# Altium PCB 车模底盘.PcbDoc (part 1 of 2)
Units mil, origin at the board's own origin, x right, y up, seen from the top; angles counter-clockwise.
Board outline 3926.98 x 3180.12 mil, 4 copper layers (Top Layer, GND, POWER, Bottom Layer); 159 components, 168 nets, 630 pads, 255 vias.
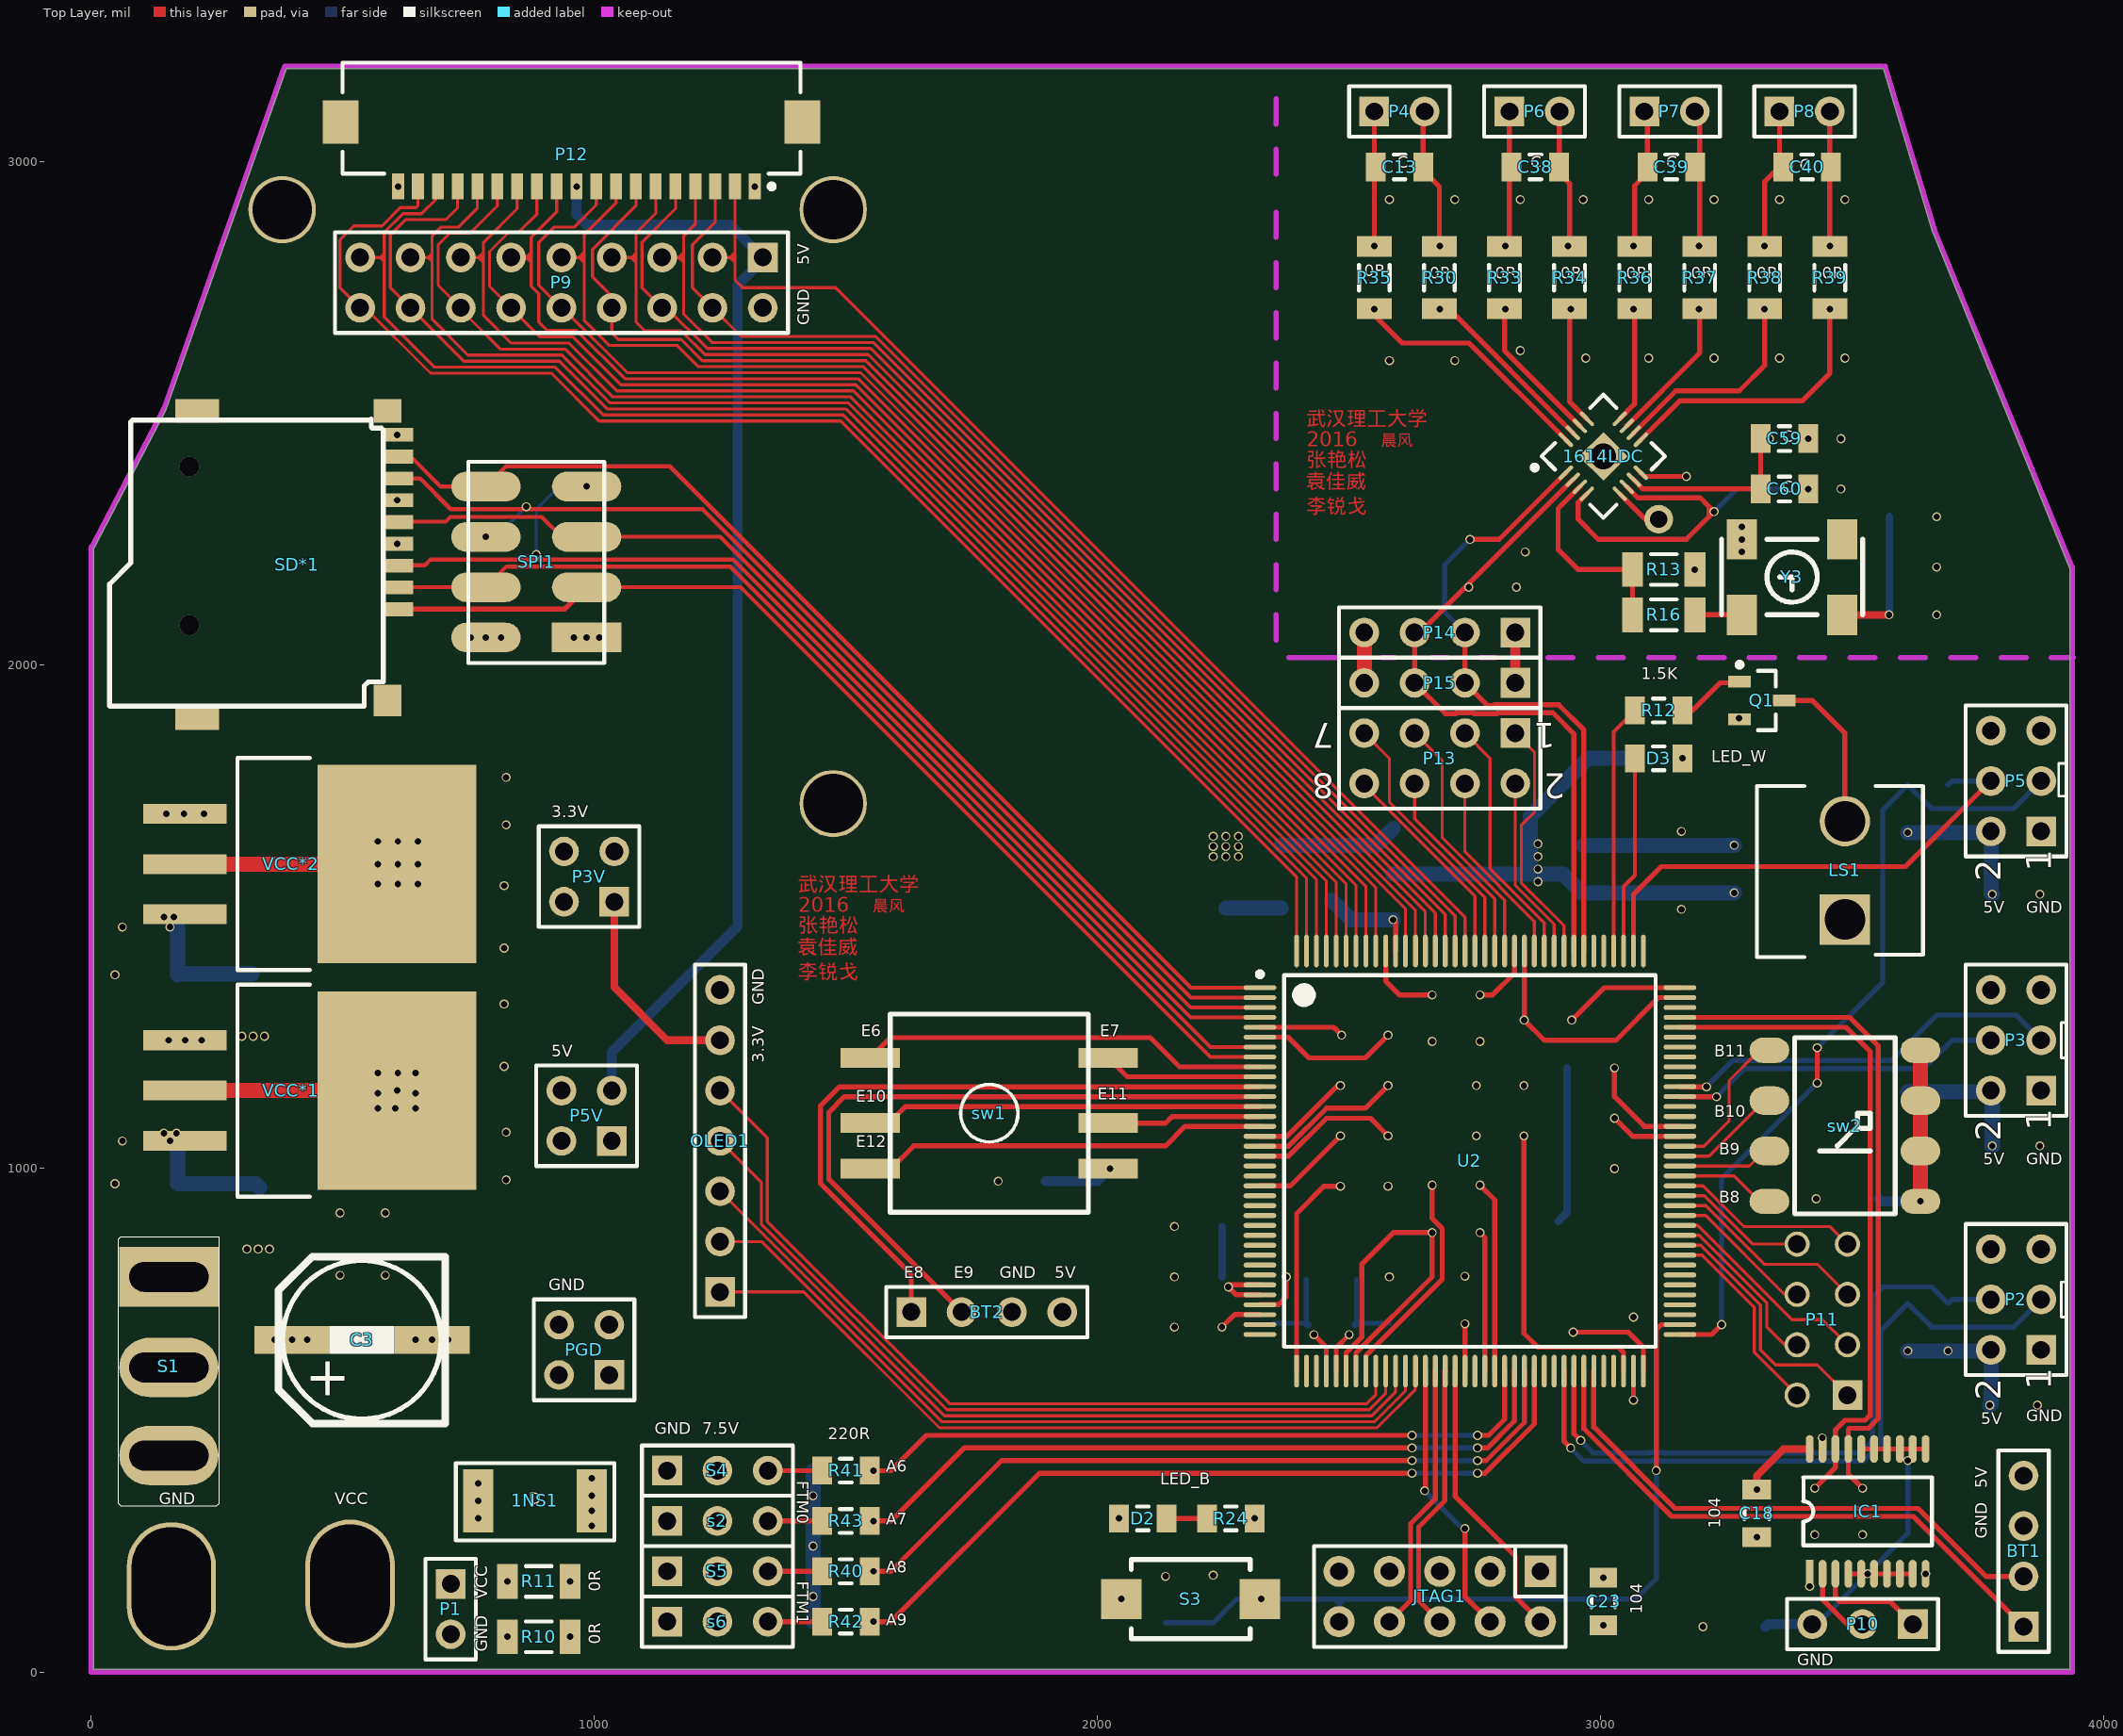
[diagram p0: Top Layer view]
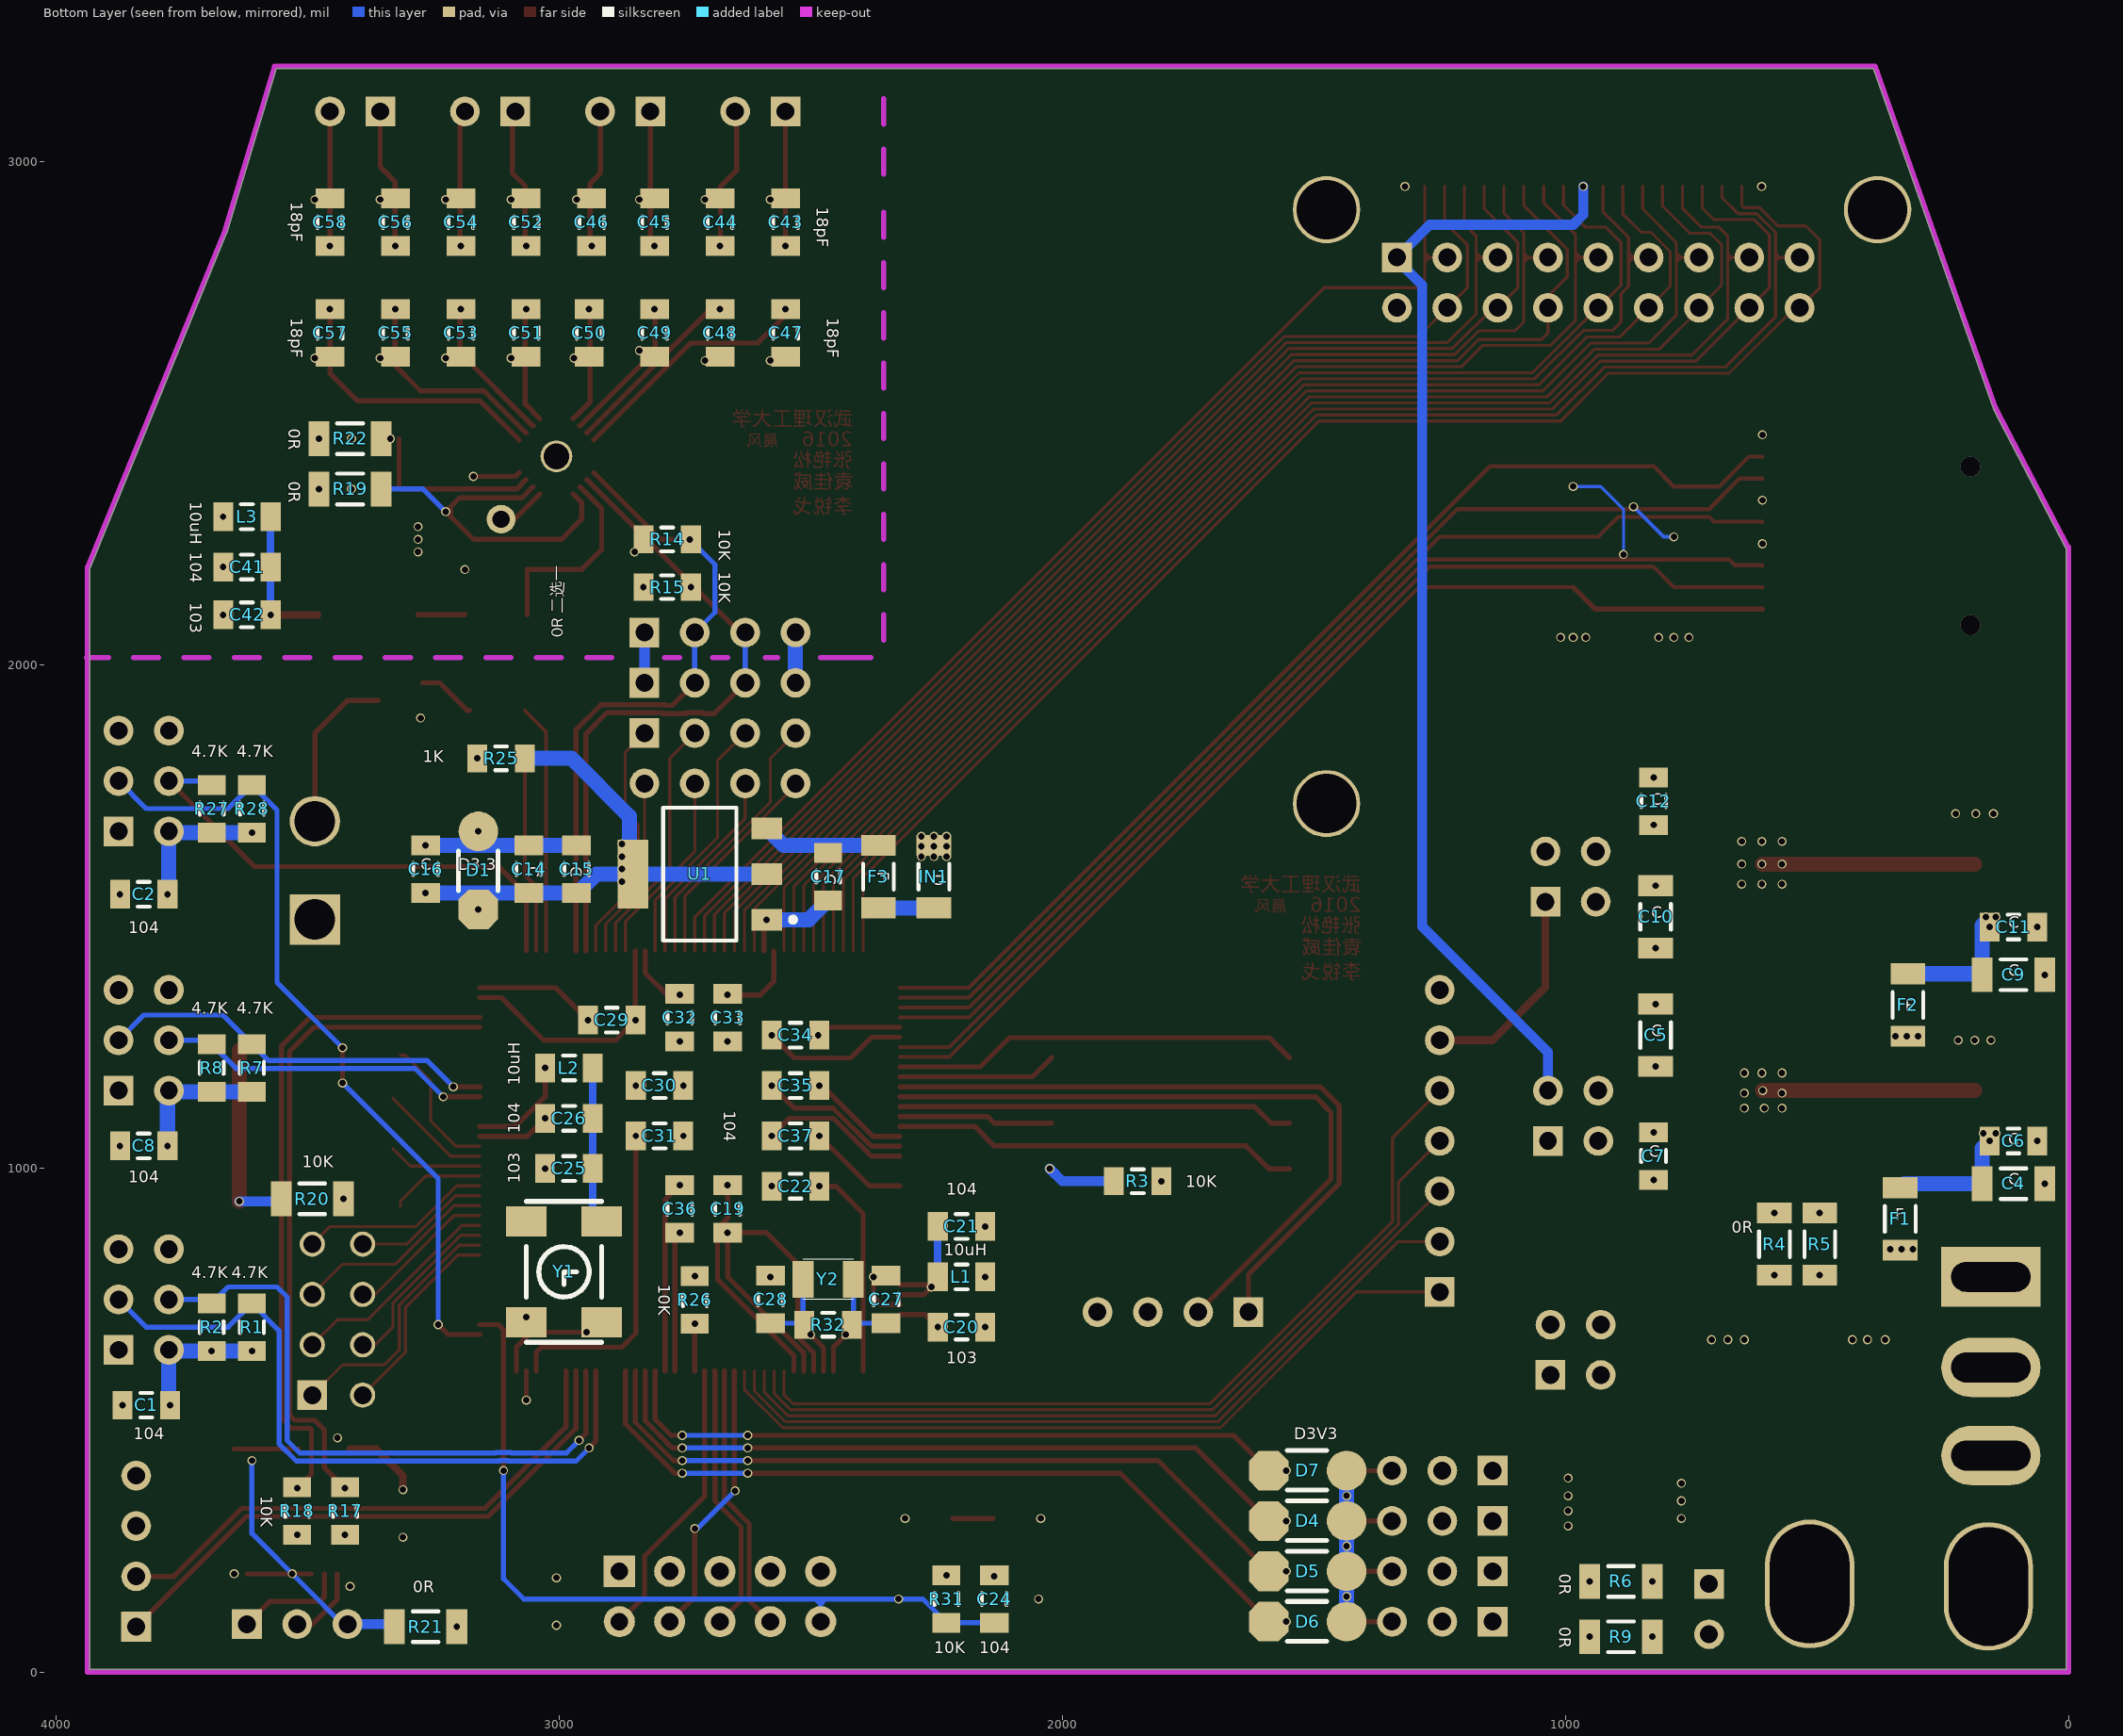
[diagram p1: Bottom Layer view, seen from below]
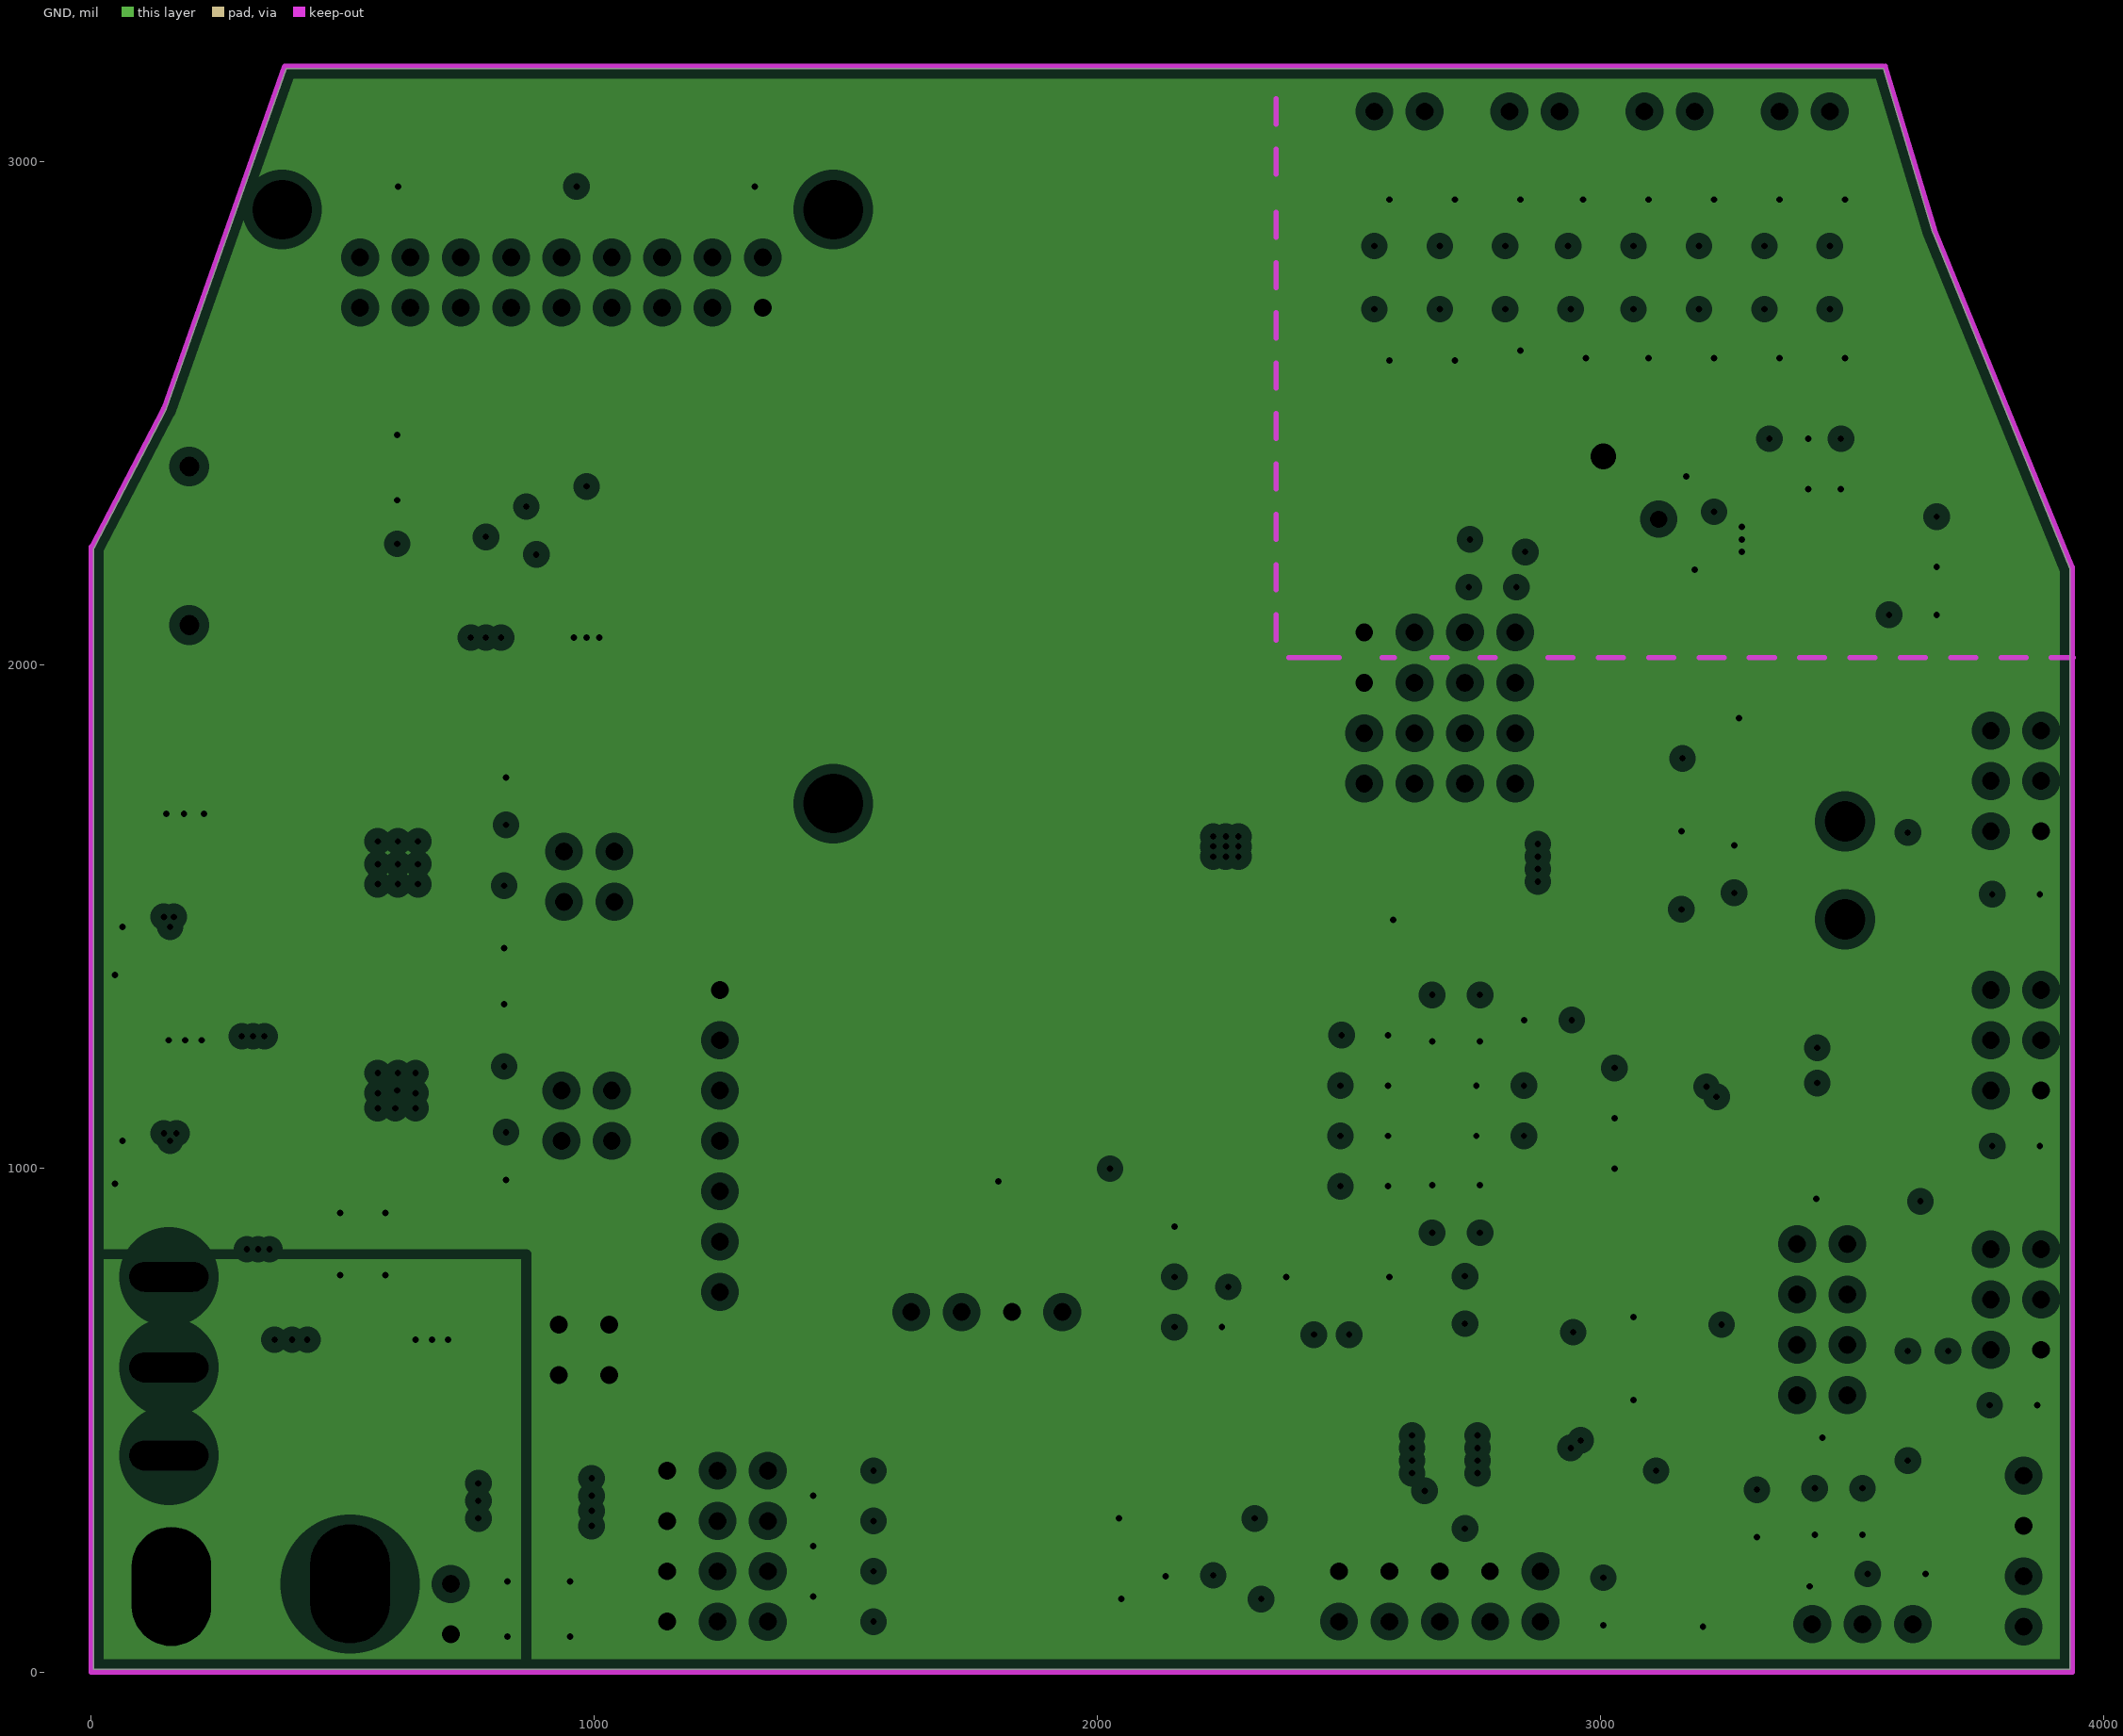
[diagram p2: GND, clearances drawn from the general rule]
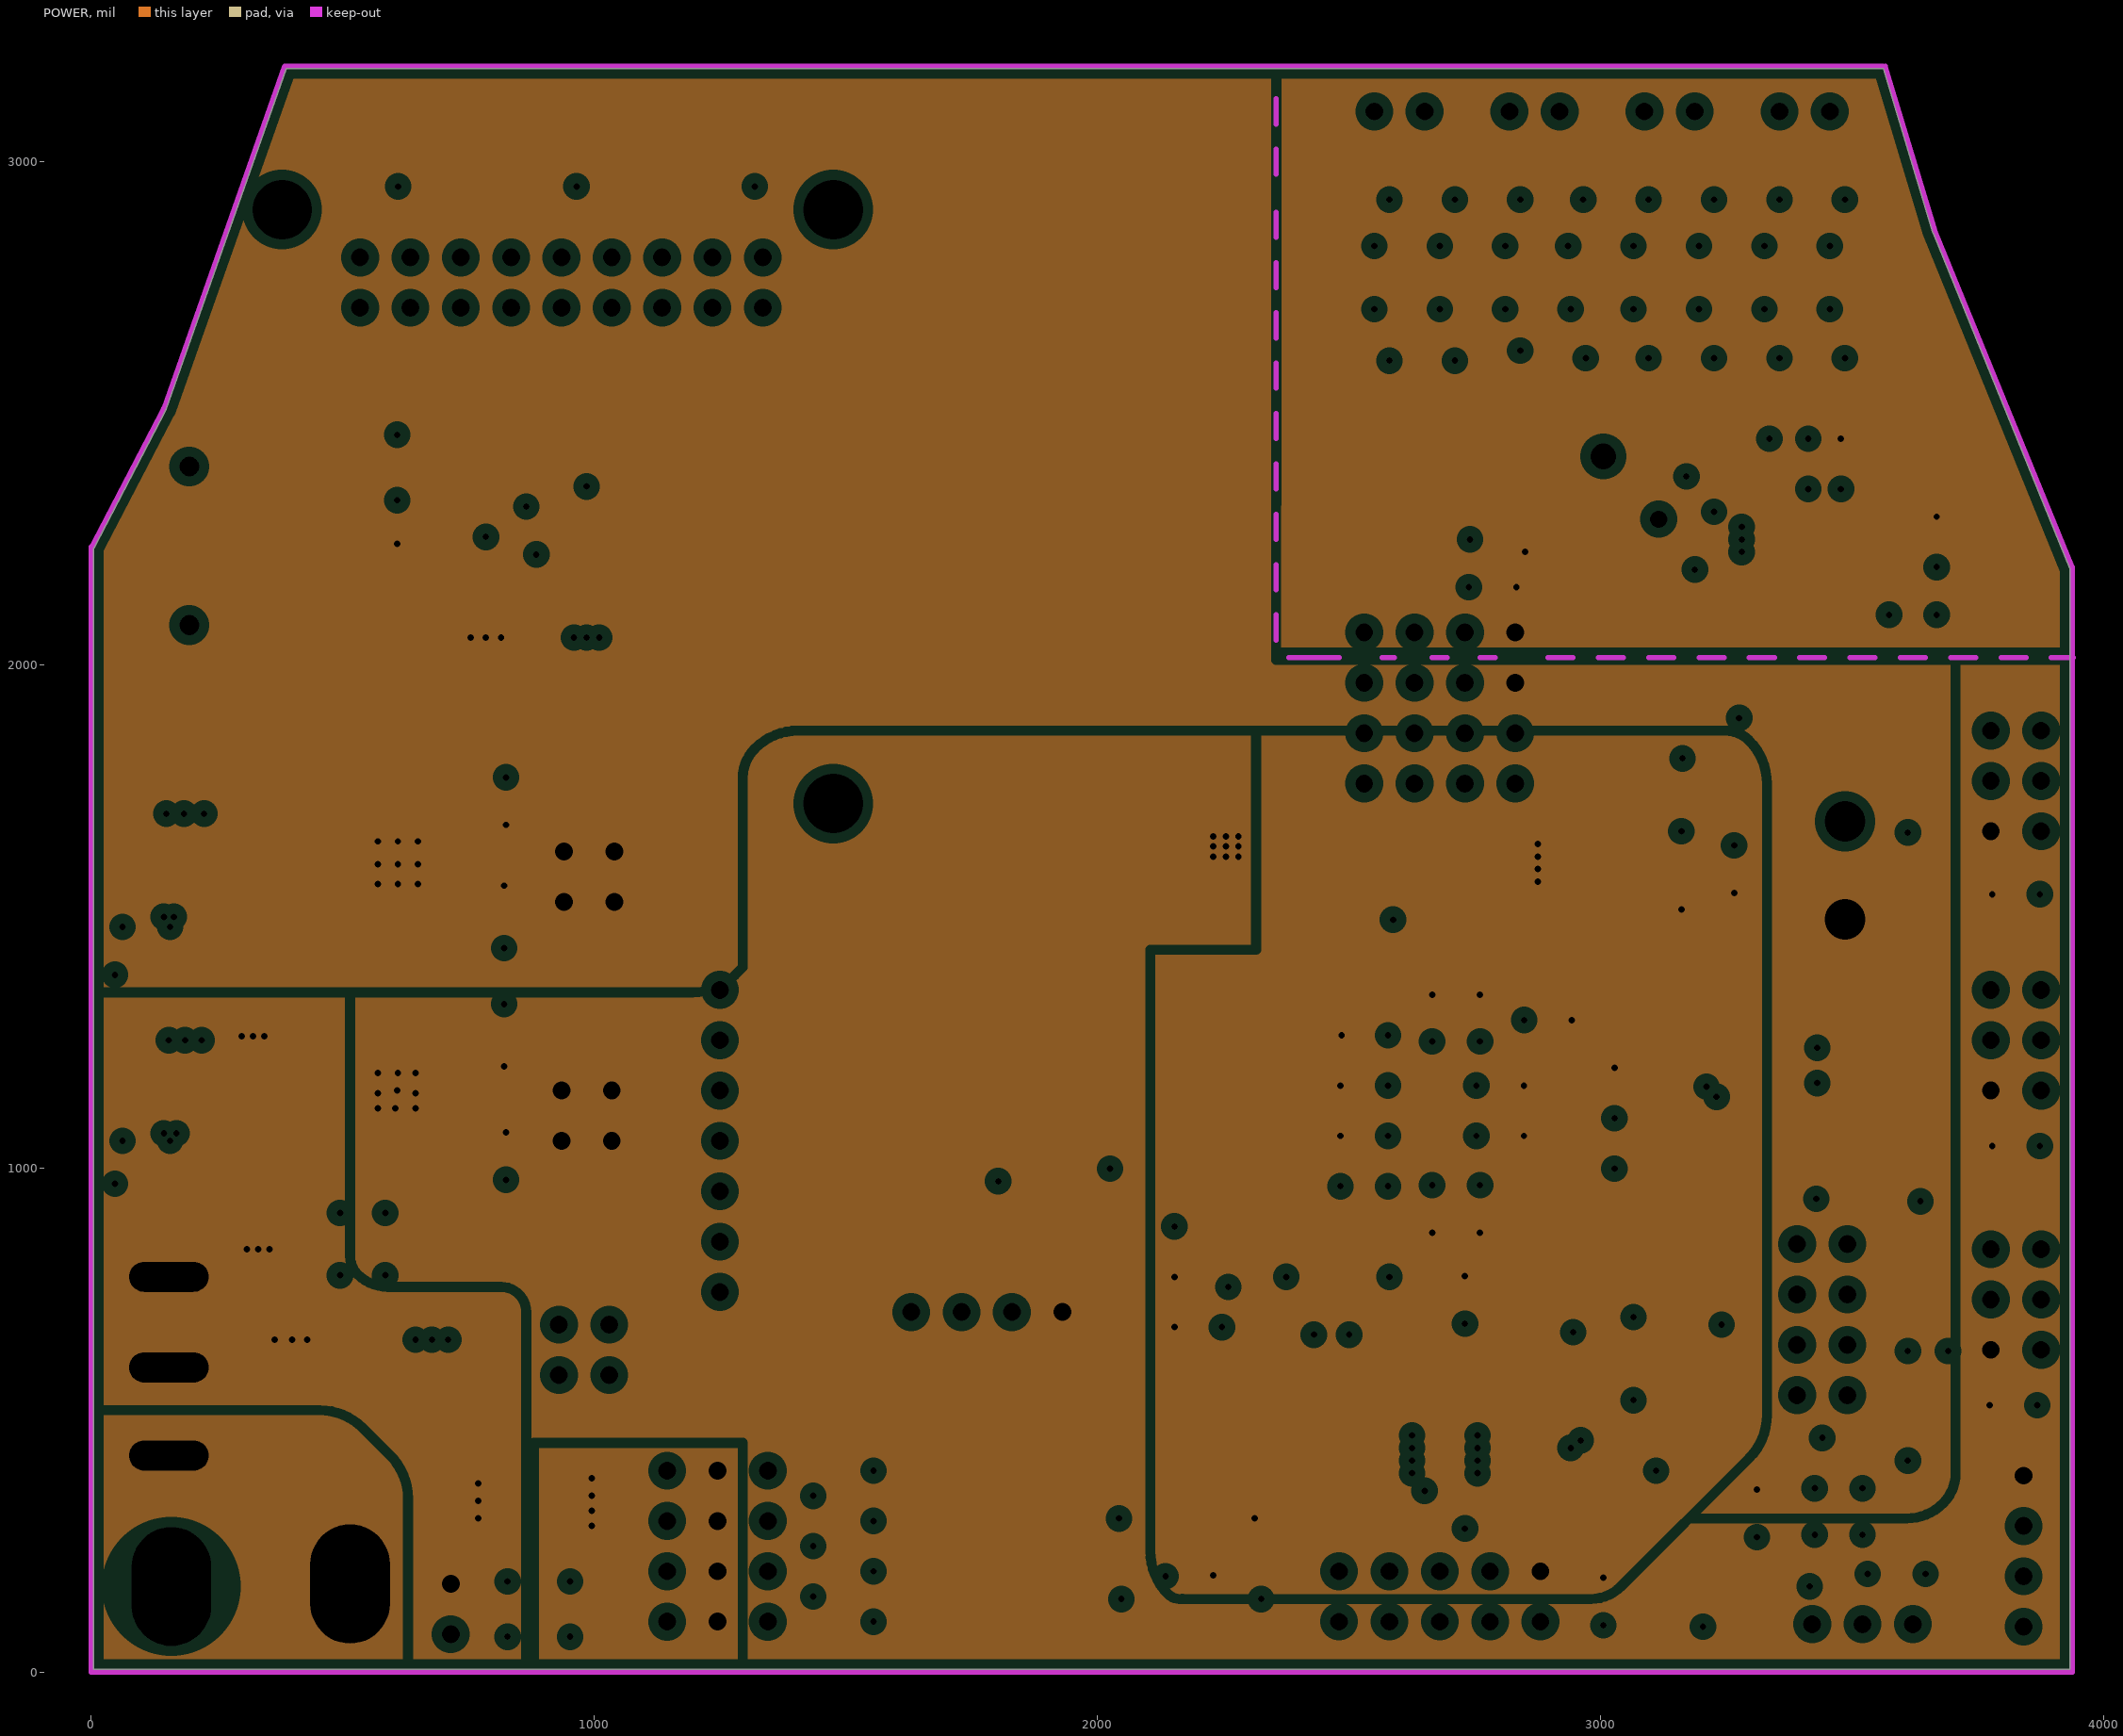
[diagram p3: POWER, clearances drawn from the general rule]

## Layer stack, top to bottom
Top Layer: signal copper 1.4
Dielectric: core 12.6, FR-4, Dk 4.8
GND: plane copper 1.4, net GND
Dielectric: prepreg 12.6, FR-4, Dk 4.8
POWER: plane copper 1.4, net (Multiple Nets)
Dielectric: core 12.6, FR-4, Dk 4.8
Bottom Layer: signal copper 1.4

## Board outline
5.02,5 5.02,2231.41 ccw(c1.5,2234.98) 5.94,2232.66 149.45,2507.66 ccw(c145,2509.98) 149.73,2508.31 388.55,3184.97 3560,3184.97 ccw(c3560,3189.98) 3561.23,3185.12 3660.2,2858.53 ccw(c3665,2859.98) 3660.36,2858.09 3931.99,2191.34 3931.99,5.02

## Design rules (kind name [scope] priority, off if disabled: settings)
Clearance [All] p1: gap=6
PlaneClearance [All] p1: clearance=20
PlaneConnect [All] p1: planeconnectstyle=Direct reliefexpansion=20 reliefentries=4 reliefconductorwidth=10 reliefairgap=10
PolygonConnect [All] p1: connectstyle=Relief reliefconductorwidth=10 reliefentries=4 polygonreliefangle="90 Angle" airgapwidth=10
RoutingVias [All] p1: holewidth=28 width=50 viastyle="Through Hole" minholewidth=28 minwidth=50 maxholewidth=28 maxwidth=50
SolderMaskExpansion [All] p1: expansion=4
Width [All] p1: maxlimit=50 minlimit=6 preferedwidth=10 minimp=50.000000 maximp=50.000000 favimp=50.000000
26 further rules are at their usual default settings.

## Components (designator, comment, footprint, x,y, rotation, side; value= is the part's Value field where it differs from the comment)
1NS1 "SK34" SK54 900,339.98 r0 top
1614LDC "LDC1614" LDC1614 3005,2414.98 r45 top
BT1 "Header 4" HDR1X4 3840,89.98 r90 top
BT2 "Header 4" HDR1X4 1630,714.98 r0 top
C1 "100nF" C2012 3820,529.98 r180 bottom
C2 "100nF" C2012 3825,1544.98 r180 bottom
C3 "Cap Pol1" SMD-EC-F8 400,660 r0 top
C4 "Cap Pol1" 1206(2) 110,969.98 r180 bottom
C5 "Cap Pol1" 1206(2) 821.06,1264.98 r90 bottom
C6 "Cap" C2012 110,1054.98 r0 bottom
C7 "Cap" C2012 825,1024.98 r90 bottom
C8 "100nF" C2012 3825,1044.98 r180 bottom
C9 "Cap Pol1" 1206(2) 110,1384.98 r180 bottom
C10 "Cap Pol1" 1206(2) 821.06,1499.98 r270 bottom
C11 "Cap" C2012 110,1479.98 r0 bottom
C12 "Cap" C2012 825,1729.98 r270 bottom
C13 "Cap" C2012 2600,2989.98 r180 top
C14 "10uF" C2012 3060,1594.98 r270 bottom
C15 "100nF" C2012 2965,1594.98 r270 bottom
C16 "2.2uF" C2012 3265,1594.98 r270 bottom
C17 "100nF" R2012 2465,1579.98 r90 bottom
C18 "100nF" C2012 3310,314.98 r270 top
C19 "100nF" c2012 2665,919.98 r270 bottom
C20 "100nF" C2012 2200,684.98 r180 bottom
C21 "10nF" C2012 2200,884.98 r0 bottom
C22 "100nF" c2012 2530,964.98 r180 bottom
C23 "100nF" R2012 3005,139.98 r270 top
C24 "100nF" C2012 2135,144.98 r270 bottom
C25 "10nF" C2012 2980,999.98 r180 bottom
C26 "100nF" C2012 2980,1099.98 r180 bottom
C27 "18pF" C2012 2350,739.98 r270 bottom
C28 "18pF" C2012 2580,739.98 r270 bottom
C29 "Cap" C2012 2895,1294.98 r0 bottom
C30 "Cap" C2012 2800,1164.98 r0 bottom
C31 "Cap" C2012 2800,1064.98 r0 bottom
C32 "Cap" C2012 2760,1299.98 r90 bottom
C33 "Cap" C2012 2665,1299.98 r90 bottom
C34 "Cap" C2012 2530,1264.98 r180 bottom
C35 "Cap" C2012 2530,1164.98 r180 bottom
C36 "Cap" C2012 2760,919.98 r270 bottom
C37 "Cap" C2012 2530,1064.98 r180 bottom
C38 "Cap" C2012 2870,2989.98 r180 top
C39 "Cap" C2012 3140,2989.98 r0 top
C40 "Cap" C2012 3410,2989.98 r180 top
C41 "10nF" C2012 3620,2194.98 r180 bottom
C42 "100nF" C2012 3620,2099.98 r180 bottom
C43 "Cap" C2012 2550,2879.98 r90 bottom
C44 "Cap" C2012 2680,2879.98 r270 bottom
C45 "Cap" C2012 2810,2879.98 r90 bottom
C46 "Cap" C2012 2935,2879.98 r270 bottom
C47 "Cap" C2012 2550,2659.98 r270 bottom
C48 "Cap" C2012 2680,2659.98 r90 bottom
C49 "Cap" C2012 2810,2659.98 r270 bottom
C50 "Cap" C2012 2940,2659.98 r90 bottom
C51 "Cap" C2012 3065,2659.98 r270 bottom
C52 "Cap" C2012 3065,2879.98 r90 bottom
C53 "Cap" C2012 3195,2659.98 r90 bottom
C54 "Cap" C2012 3195,2879.98 r270 bottom
C55 "Cap" C2012 3325,2659.98 r270 bottom
C56 "Cap" C2012 3325,2879.98 r90 bottom
C57 "Cap" C2012 3455,2659.98 r90 bottom
C58 "Cap" C2012 3455,2879.98 r270 bottom
C59 "Cap" C2012 3365,2449.98 r180 top
C60 "Cap" C2012 3365,2349.98 r180 top
D1 "1N4729A" "hole-chip diode" 3200,1669.98 r270 bottom
D2 "POWER" R2012 2090,304.98 r180 top
D3 "POWER" R2012 3115,1814.98 r180 top
D4 "1N4729A" "hole-chip diode" 1435,339.98 r0 bottom
D5 "1N4729A" "hole-chip diode" 1435,239.98 r0 bottom
D6 "1N4729A" "hole-chip diode" 1435,139.98 r0 bottom
D7 "1N4729A" "hole-chip diode" 1435,439.98 r0 bottom
F1 "1.5A" 1206(2) 335,900 r90 bottom
F2 "500mA" 1206(2) 320,1324.98 r90 bottom
F3 "300mA" 1206(2) 2365,1579.98 r270 bottom
IC1 "74LVC245" "74LVC245 TSSOP" 3415,194.98 r90 top
IN1 "1SS355" 1206(2) 2255,1579.98 r270 bottom
JTAG1 "Header 5X2" IDC5X2 2680,149.98 r180 top
L1 "Inductor" C2012 2200,784.98 r0 bottom
L2 "Inductor" C2012 2980,1199.98 r180 bottom
L3 "Inductor" C2012 3620,2294.98 r180 bottom
LS1 "Buzzer" ABSM-1574 3475,1360 r90 top
OLED1 "Header 7" HDR1X7 1250,754.98 r90 top
P1 "Header 2" HDR1X2 715,175 r270 top
P2 "Header 3X2" HDR2X3 3875,639.98 r90 top
P3 "Header 3X2" HDR2X3 3875,1154.98 r90 top
P3V "Header 2X2" HDR2X2 1040,1529.98 r90 top
P4 "Header 2" HDR1X2 2550,3099.98 r0 top
P5 "Header 3X2" HDR2X3 3875,1669.98 r90 top
P5V "Header 2X2" HDR2X2 1035,1054.98 r90 top
P6 "Header 2" HDR1X2 2818.33,3099.98 r0 top
P7 "Header 2" HDR1X2 3086.67,3099.98 r0 top
P8 "Header 2" HDR1X2 3355,3099.98 r0 top
P9 "Header 9X2" HDR2X9 1335,2809.98 r180 top
P10 "Header 3" HDR1X3 3620,94.98 r180 top
P11 "Header 4X2" HDR2X4#1 3490,549.98 r90 top
P12 "Header 19" FFC/SM1.0-2H19 955,3014.98 r180 top
P13 "Header 4X2" HDR2X4#2 2830,1864.98 r180 top
P14 "Header 4" HDR1X4 2830,2064.98 r180 top
P15 "Header 4" HDR1X4 2830,1964.98 r180 top
PGD "Header 2X2" HDR2X2 1030,589.98 r90 top
Q1 "QNPN" SOT95P240-3N 3320,1930 r0 top
R1 "Res2" R2012 3610,684.98 r270 bottom
R2 "Res2" R2012 3690,684.98 r90 bottom
R3 "10k" R2012 1850,974.98 r0 bottom
R4 "Res2" 1206(2) 585,850 r270 bottom
R5 "Res2" 1206(2) 495,850 r270 bottom
R6 "Res2" 1206(2) 890,179.98 r180 bottom
R7 "Res2" R2012 3610,1199.98 r90 bottom
R8 "Res2" R2012 3690,1199.98 r270 bottom
R9 "Res2" 1206(2) 890,69.98 r180 bottom
R10 "Res2" 1206(2) 890,69.98 r180 top
R11 "Res2" 1206(2) 890,179.98 r180 top
R12 "Res2" R2012 3115,1910 r180 top
R13 "Res2" 1206(2) 3125,2189.98 r0 top
R14 "Res2" R2012 2785,2249.98 r0 bottom
R15 "Res2" R2012 2785,2154.98 r0 bottom
R16 "Res2" 1206(2) 3125,2099.98 r0 top
R17 "Res2" R2012 3425,319.98 r270 bottom
R18 "Res2" R2012 3520,319.98 r270 bottom
R19 "Res2" 1206(2) 3415,2349.98 r0 bottom
R20 "Res2" 1206(2) 3490,939.98 r0 bottom
R21 "Res2" 1206(2) 3265,89.98 r0 bottom
R22 "Res2" 1206(2) 3415,2449.98 r0 bottom
R24 "1K" R2012 2265,304.98 r0 top
R25 "1K" R2012 3115,1815 r180 bottom
R26 "10K" R2012 2730,739 r270 bottom
R27 "Res2" R2012 3690,1714.98 r270 bottom
R28 "Res2" R2012 3610,1714.98 r90 bottom
R30 "Res2" 1206(2) 2679.29,2769.98 r270 top
R31 "10K" R2012 2230,144.98 r90 bottom
R32 "1M" R2012 2465,689.98 r0 bottom
R33 "Res2" 1206(2) 2808.57,2769.98 r270 top
R34 "Res2" 1206(2) 2937.86,2769.98 r270 top
R35 "Res2" 1206(2) 2550,2769.98 r270 top
R36 "Res2" 1206(2) 3067.14,2769.98 r90 top
R37 "Res2" 1206(2) 3196.43,2769.98 r90 top
R38 "Res2" 1206(2) 3325.71,2769.98 r90 top
R39 "Res2" 1206(2) 3455,2769.98 r90 top
R40 "220R" R2012 1500,199.98 r0 top
R41 "220R" R2012 1500,399.98 r0 top
R42 "220R" R2012 1500,99.98 r0 top
R43 "220R" R2012 1500,299.98 r0 top
S1 "SW-SPST" SW-125V6A(-) 155,785 r270 top
s2 "Header 3" HDR1X3 1145,299.98 r0 top
S3 "SW-PB" SMT_Button 2185,144.98 r0 top
S4 "Header 3" HDR1X3 1145,399.98 r0 top
S5 "Header 3" HDR1X3 1145,199.98 r0 top
s6 "Header 3" HDR1X3 1145,99.98 r0 top
SD*1 "TF_card" SD_card 265,2274.98 r0 top
SPI1 "Header 4X2A" "SMT head4*1" 880,2209.98 r180 top
sw1 "SW-5" SW-5 1785,1109.98 r0 top
sw2 "switch-4to4" switch_4to4 3335,934.98 r0 top
U1 "REG1117" SOT223 2720,1584.98 r90 bottom
U2 "K60P144" LQFP144 2740,1014.98 r0 top
VCC*1 "LM1084" "DPAK LM2940" 435,1154.98 r0 top
VCC*2 "LM1086" "DPAK LM2940" 435,1604.98 r0 top
Y1 "50MHZ" 贴片有源晶体 3065,894.98 r270 bottom
Y2 "32.768K" CT3215 2415,779.98 r0 bottom
Y3 "8MHZ" 贴片有源晶体 3480,2249.98 r180 top

## Footprints (in the part's own frame and the unit in brackets; to place one, negate y for a bottom-side part, rotate by r counter-clockwise, add the part's x,y. Pads: shape width x height; smd on the part's side, far side on the other; paste and mask are expansions set on the pad)
"74LVC245 TSSOP" [mm]
  rect 1.4x0.4 smd: 1(0,0)
  oval 1.4x0.4 smd: 2(0,-0.65) 3(0,-1.3) 4(0,-1.95) 5(0,-2.6) 6(0,-3.25) 7(0,-3.9) 8(0,-4.55) 9(0,-5.2) 10(0,-5.85) 11(6.3,-5.85) 12(6.3,-5.2) 13(6.3,-4.55) 14(6.3,-3.9) 15(6.3,-3.25) 16(6.3,-2.6) 17(6.3,-1.95) 18(6.3,-1.3) 19(6.3,-0.65) 20(6.3,0)
  silkscreen extent 1.43,-6.18 4.87,0.33
1206(2) [mm]
  rect 1.05x1.75 smd: 1(-1.575,0) 2(1.575,0)
  silkscreen extent -0.65,-0.77 0.65,0.77, body extent -1.6,-0.8 1.6,0.8, height 1.6
ABSM-1574 [mil] "Magnetic Transducer Buzzer"
  rect 100x100 hole 80: 1A(135,-10)
  round 100 hole 80: 2A(330,-10)
  silkscreen extent 60,-165 400,165
C2012 [mm] "Chip Capacitor, 2-Leads, Body 2.0x1.2mm, IPC Low Density"
  rect 1x1.45 smd: 1(-1.2,0) 2(1.2,0)
  silkscreen extent -0.3,-0.63 0.3,0.63, body extent -0.98,-0.6 1.02,0.6, height 0.5
c2012 [mm] "Chip Capacitor, 2-Leads, Body 2.0x1.2mm, IPC Low Density"
  rect 1x1.45 smd: 1(-1.2,0) 2(1.2,0)
  silkscreen extent -0.3,-0.63 0.3,0.63, body extent -0.98,-0.6 1.02,0.6, height 0.5
CT3215 [mm]
  rect 1.05x1.85 smd: 1(0,0) 2(2.54,0)
  silkscreen extent 0,-1.02 2.54,1.02
"DPAK LM2940" [mm] "D2-PAK, 4-Pads, Body 7.93x8.69mm (max), IPC Medium Density"
  rect 4.2x1 smd: 1(-6.3,2.54) 2(-6.3,0) 3(-6.3,-2.54)
  rect 8x10 smd: 4(4.4,0)
  silkscreen extent -3.65,-5.35 0,5.35, body extent -3.65,-5.33 6,5.33, height 4.83
FFC/SM1.0-2H19 [mm] "Connector; FH12 Series; 19 Position; 1.0mm Spaced Bottom Eccentric Contact"
  rect 0.6x1.3 smd: 1(-9.25,1.625) 2(-8.25,1.625) 3(-7.25,1.625) 4(-6.25,1.625) 5(-5.25,1.625) 6(-4.25,1.625) 7(-3.25,1.625) 8(-2.25,1.625) 9(-1.25,1.625) 10(-0.25,1.625) 11(0.75,1.625) 12(1.75,1.625) 13(2.75,1.625) 14(3.75,1.625) 15(4.75,1.625) 16(5.75,1.625) 17(6.75,1.625) 18(7.75,1.625) 19(8.75,1.625)
  rect 1.8x2.2 smd: 20(11.65,-1.625) 21(-11.65,-1.625)
  silkscreen extent -11.55,-4.62 11.55,1.75, body extent -11.55,-4.62 11.55,0.97, height 2
HDR1X2 [mm] "Connector; Header; 2 Position"
  rect 1.5x1.5 hole 0.9: 1(0,0)
  round 1.5 hole 0.9: 2(2.54,0)
  silkscreen extent -1.27,-1.27 3.81,1.27
HDR1X3 [mm] "Connector; Header; 3 Position"
  rect 1.5x1.5 hole 0.9: 1(0,0)
  round 1.5 hole 0.9: 2(2.54,0) 3(5.08,0)
  silkscreen extent -1.27,-1.27 6.35,1.27
HDR1X4 [mm] "Connector; Header; 4 Position"
  rect 1.5x1.5 hole 0.9: 1(0,0)
  round 1.5 hole 0.9: 2(2.54,0) 3(5.08,0) 4(7.62,0)
  silkscreen extent -1.27,-1.27 8.89,1.27
HDR1X7 [mm] "Connector; Header; 7 Position"
  rect 1.5x1.5 hole 0.9: 1(0,0)
  round 1.5 hole 0.9: 2(2.54,0) 3(5.08,0) 4(7.62,0) 5(10.16,0) 6(12.7,0) 7(15.24,0)
  silkscreen extent -1.27,-1.27 16.51,1.27
HDR2X2 [mm] "Connector; Header; 2x2 Position"
  rect 1.5x1.5 hole 0.9: 1(0,0)
  round 1.5 hole 0.9: 2(0,2.54) 3(2.54,0) 4(2.54,2.54)
  silkscreen extent -1.27,-1.27 3.81,3.81
HDR2X3 [mm] "Connector; Header; 3x2 Position"
  rect 1.5x1.5 hole 0.9: 1(0,0)
  round 1.5 hole 0.9: 2(0,2.54) 3(2.54,0) 4(2.54,2.54) 5(5.08,0) 6(5.08,2.54)
  silkscreen extent -1.27,-1.27 6.35,3.81
HDR2X4#1 [mm] "Connector; Header; 4x2 Position"
  rect 1.5x1.5 hole 0.9: 1(0,0)
  round 1.27 hole 0.9: 2(0,2.54) 3(2.54,0) 4(2.54,2.54) 5(5.08,0) 6(5.08,2.54) 7(7.62,0) 8(7.62,2.54)
  body extent -1.27,-1.27 8.89,3.81, height 7.58
HDR2X4#2 [mm] "Connector; Header; 4x2 Position"
  rect 1.5x1.5 hole 0.9: 1(0,0)
  round 1.5 hole 0.9: 2(0,2.54) 3(2.54,0) 4(2.54,2.54) 5(5.08,0) 6(5.08,2.54) 7(7.62,0) 8(7.62,2.54)
  silkscreen extent -1.27,-1.27 8.89,3.81, body extent -1.27,-1.27 8.89,3.81, height 7.58
HDR2X9 [mm] "Connector; Header; 9x2 Position"
  rect 1.5x1.5 hole 0.9: 1(0,0)
  round 1.5 hole 0.9: 2(0,2.54) 3(2.54,0) 4(2.54,2.54) 5(5.08,0) 6(5.08,2.54) 7(7.62,0) 8(7.62,2.54) 9(10.16,0) 10(10.16,2.54) 11(12.7,0) 12(12.7,2.54) 13(15.24,0) 14(15.24,2.54) 15(17.78,0) 16(17.78,2.54) 17(20.32,0) 18(20.32,2.54)
  silkscreen extent -1.27,-1.27 21.59,3.81, body extent -1.27,-1.27 21.59,3.81, height 7.58
"hole-chip diode" [mm]
  round 2 smd: 1(0,1.016)
  oct 2x2 smd: 2(3.937,1.016)
  silkscreen extent 1,0 3,2
IDC5X2 [mil]
  rect 62x62 hole 35: 1(-200,-50)
  round 62 hole 35: 2(-200,50) 3(-100,-50) 4(-100,50) 5(0,-50) 6(0,50) 7(100,-50) 8(100,50) 9(200,-50) 10(200,50)
  silkscreen extent -250,-100 250,100
LDC1614 [mm] "QFN, 16-Leads, Body 4.00x4.00mm, Pitch 0.50mm, Thermal Pad 1.74x1.74mm, IPC Medium Density"
  oval 0.95x0.2 smd: 1(-1.925,0.75) 2(-1.925,0.25) 3(-1.925,-0.25) 4(-1.925,-0.75) 9(1.925,-0.75) 10(1.925,-0.25) 11(1.925,0.25) 12(1.925,0.75)
  oval 0.2x0.95 smd: 5(-0.75,-1.925) 6(-0.25,-1.925) 7(0.25,-1.925) 8(0.75,-1.925) 13(0.75,1.925) 14(0.25,1.925) 15(-0.25,1.925) 16(-0.75,1.925)
  rect 1.74x1.74 smd: 17(0,0)
  silkscreen extent -2.97,-2.2 2.2,2.2, body extent -2.05,-2.05 2.05,2.05, height 0.8
LQFP144 [mm]
  oval 1.65x0.25 smd: 1(-10.6,8.75) 2(-10.6,8.25) 3(-10.6,7.75) 4(-10.6,7.25) 5(-10.6,6.75) 6(-10.6,6.25) 7(-10.6,5.75) 8(-10.6,5.25) 9(-10.6,4.75) 10(-10.6,4.25) 11(-10.6,3.75) 12(-10.6,3.25) 13(-10.6,2.75) 14(-10.6,2.25) 15(-10.6,1.75) 16(-10.6,1.25) 17(-10.6,0.75) 18(-10.6,0.25) 19(-10.6,-0.25) 20(-10.6,-0.75) 21(-10.6,-1.25) 22(-10.6,-1.75) 23(-10.6,-2.25) 24(-10.6,-2.75) 25(-10.6,-3.25) 26(-10.6,-3.75) 27(-10.6,-4.25) 28(-10.6,-4.75) 29(-10.6,-5.25) 30(-10.6,-5.75) 31(-10.6,-6.25) 32(-10.6,-6.75) 33(-10.6,-7.25) 34(-10.6,-7.75) 35(-10.6,-8.25) 36(-10.6,-8.75) 73(10.6,-8.75) 74(10.6,-8.25) 75(10.6,-7.75) 76(10.6,-7.25) 77(10.6,-6.75) 78(10.6,-6.25) 79(10.6,-5.75) 80(10.6,-5.25) 81(10.6,-4.75) 82(10.6,-4.25) 83(10.6,-3.75) 84(10.6,-3.25) 85(10.6,-2.75) 86(10.6,-2.25) 87(10.6,-1.75) 88(10.6,-1.25) 89(10.6,-0.75) 90(10.6,-0.25) 91(10.6,0.25) 92(10.6,0.75) 93(10.6,1.25) 94(10.6,1.75) 95(10.6,2.25) 96(10.6,2.75) 97(10.6,3.25) 98(10.6,3.75) 99(10.6,4.25) 100(10.6,4.75) 101(10.6,5.25) 102(10.6,5.75) 103(10.6,6.25) 104(10.6,6.75) 105(10.6,7.25) 106(10.6,7.75) 107(10.6,8.25) 108(10.6,8.75)
  oval 0.25x1.65 smd: 37(-8.75,-10.6) 38(-8.25,-10.6) 39(-7.75,-10.6) 40(-7.25,-10.6) 41(-6.75,-10.6) 42(-6.25,-10.6) 43(-5.75,-10.6) 44(-5.25,-10.6) 45(-4.75,-10.6) 46(-4.25,-10.6) 47(-3.75,-10.6) 48(-3.25,-10.6) 49(-2.75,-10.6) 50(-2.25,-10.6) 51(-1.75,-10.6) 52(-1.25,-10.6) 53(-0.75,-10.6) 54(-0.25,-10.6) 55(0.25,-10.6) 56(0.75,-10.6) 57(1.25,-10.6) 58(1.75,-10.6) 59(2.25,-10.6) 60(2.75,-10.6) 61(3.25,-10.6) 62(3.75,-10.6) 63(4.25,-10.6) 64(4.75,-10.6) 65(5.25,-10.6) 66(5.75,-10.6) 67(6.25,-10.6) 68(6.75,-10.6) 69(7.25,-10.6) 70(7.75,-10.6) 71(8.25,-10.6) 72(8.75,-10.6) 109(8.75,10.6) 110(8.25,10.6) 111(7.75,10.6) 112(7.25,10.6) 113(6.75,10.6) 114(6.25,10.6) 115(5.75,10.6) 116(5.25,10.6) 117(4.75,10.6) 118(4.25,10.6) 119(3.75,10.6) 120(3.25,10.6) 121(2.75,10.6) 122(2.25,10.6) 123(1.75,10.6) 124(1.25,10.6) 125(0.75,10.6) 126(0.25,10.6) 127(-0.25,10.6) 128(-0.75,10.6) 129(-1.25,10.6) 130(-1.75,10.6) 131(-2.25,10.6) 132(-2.75,10.6) 133(-3.25,10.6) 134(-3.75,10.6) 135(-4.25,10.6) 136(-4.75,10.6) 137(-5.25,10.6) 138(-5.75,10.6) 139(-6.25,10.6) 140(-6.75,10.6) 141(-7.25,10.6) 142(-7.75,10.6) 143(-8.25,10.6) 144(-8.75,10.6)
  silkscreen extent -10.72,-9.38 9.38,9.55, body extent -10,-10 10,10, height 1.6
R2012 [mm] "Chip Resistor, 2-Leads, Body 2.0x1.2mm, IPC Low Density"
  rect 1x1.4 smd: 1(-1.2,0) 2(1.2,0)
  silkscreen extent -0.3,-0.6 0.3,0.6, body extent -0.98,-0.6 1.02,0.6, height 0.5
SD_card [mm]
  rect 1.6x0.7 smd: 1(8.732,-4.16) 2(8.732,-3.06) 3(8.732,-1.96) 4(8.732,-0.86) 5(8.732,0.24) 6(8.732,1.34) 7(8.732,2.44) 8(8.732,3.54) 9(8.732,4.64)
  rect 1.4x1.2 smd: 10(8.232,5.84)
  rect 2.2x1.2 smd: 11(-1.368,5.84) 12(-1.368,-9.66)
  rect 1.4x1.6 smd: 13(8.232,-8.76)
  silkscreen extent -5.79,-9.04 8.03,5.43
SK54 [mm]
  rect 1.52x3.18 smd: A(-3.305,0) K(2.413,0)
  silkscreen extent -4.44,-2 3.56,1.91
SMD-EC-F8 [mm]
  rect 3.8x1.4 smd: 1(0,0) 2(7.051,0)
  silkscreen extent -0.69,-4.22 7.71,4.2
"SMT head4*1" [mil]
  rect 137.8x59.06 smd: 1(-105,155)
  oval 137.8x59.06 smd: 2(-105,55) 3(-105,-45) 4(-105,-145) 5(95,155) 6(95,55) 7(95,-45) 8(95,-145)
  silkscreen extent -140,-194 130,206
SMT_Button [mil]
  rect 80x80 smd: 1(-137.8,0) 2(137.8,0)
  silkscreen extent -118,-79 118,79
SOT95P240-3N [mm] "SOT23, 3-Leads, Body 2.9x1.3mm, Pitch 0.95mm, Lead Span 2.4mm, IPC Medium Density"
  rect 1.15x0.6 smd: 1(-1.125,0.95) 2(-1.125,-0.95) 3(1.125,0)
  silkscreen extent -1.25,-1.5 0.7,1.92, body extent -0.7,-1.5 0.7,1.5, height 1.14
SOT223 [mm] "SOT-223/SC-73; 4 Leads; Body 6.7 x 7.3 mm, inc. leads (LxW max)"
  rect 1.1x1.55 smd: 1(-2.3,-3.375) 2(0,-3.375) 3(2.3,-3.375)
  rect 3.45x1.55 smd: 4(0,3.375)
  silkscreen extent -3.35,-4.82 3.35,1.85, body extent -3.25,-3.47 3.25,3.49, height 1.66
SW-5 [mm]
  rect 3x1 smd: 1(-6,2.8) 2(-6,-0.5) 3(-6,-2.8) 4(6,-2.8) 5(6,-0.5) 6(6,2.8)
  silkscreen extent -5,-5 5,5
SW-125V6A(-) [mm]
  rect 3x5 hole 1.5 slot 4 at 90 deg: 0(0,0)
  oval 3x5 hole 1.5 slot 4 at 90 deg: 1(4.572,0) 2(9.017,0)
  silkscreen extent -2.03,-2.54 11.56,2.54
switch_4to4 [mm]
  oval 2x1.27 smd: 1(0,7.62) 4(0,0) 5(7.62,0) 8(7.62,7.62)
  oval 2x1.448 smd: 2(0,5.08) 3(0,2.54) 6(7.62,2.54) 7(7.62,5.08)
  silkscreen extent 1.27,-0.64 6.35,8.25
贴片有源晶体 [mil]
  rect 60x80 smd: 1(0,0) 2(200,0) 3(200,150) 4(0,150)
  silkscreen extent -40,0 240,150, body extent -37,-23 238,173, height 74

## Part data
1NS1 D1 D4 D5 D6 D7 IN1: library part "Diode 1N4148", "High Conductance Fast Diode"
BT1 BT2 P14 P15: "Header, 4-Pin"
C1 C2 C8 C14 C15 C16 C17 C18 C19 C20 C21 C22 C23 C24 C25 C26 C41 C42: library part Cap, "Capacitor"
C3 C4 C5 C9 C10: "Polarized Capacitor (Radial)"
C6 C7 C11 C12 C13 C29 C30 C31 C32 C33 C34 C35 C36 C37 C38 C39 C40 C43 C44 C45 C46 C47 C48 C49 C50 C51 C52 C53 C54 C55 C56 C57 C58 C59 C60: "贴片电容"
C27 C28: library part 陶瓷电容, "CAP"
D2 D3: library part LED, "Typical INFRARED GaAs LED"
F1 F2 F3: library part "Fuse 1", "Fuse"
JTAG1: "Header, 5-Pin, Dual row"
LS1: "Magnetic Transducer Buzzer"
OLED1: "Header, 7-Pin"
P1 P4 P6 P7 P8: "Header, 2-Pin"
P2 P3 P5: "Header, 3-Pin, Dual row"
P3V P5V PGD: "Header, 2-Pin, Dual row"
P9: "Header, 9-Pin, Dual row"
P10 s2 S4 S5 s6: "Header, 3-Pin"
P11 P13 SPI1: "Header, 4-Pin, Dual row"
P12: "Header, 19-Pin"
Q1: "NPN Bipolar Transistor"
R1 R2 R4 R5 R6 R7 R8 R9 R10 R11 R12 R13 R14 R15 R16 R17 R18 R19 R20 R21 R22 R27 R28 R30 R33 R34 R35 R36 R37 R38 R39: "Resistor"
R3: library part Res, "Resistor of led"
R24 R25 R26 R31 R32 R40 R41 R42 R43: library part Res, "Resistor"
S1: "Single-Pole, Single-Throw Switch"
S3: "Switch"
U1: "800mA and 1A Low Dropout Positive Regulator 2.85V, 3.3V, 5V, and Adjustable"
VCC*1: library part LM1086
Y1 Y3: library part XTAL1
Y2: library part XTAL, "Crystal Oscillator"

## Free pads (board coordinates)
  oval 177.17x255.91 hole 157.48 slot 236.22 at 90 deg: 0(515,174.98) 1(160,169.98)
  round 62.99 hole 51.18: 0(3005,2414.98)
  round 57 hole 34: 0(3115,2289.98)
  round 133.86 hole 118.11: 1(380,2904.98) 2(1475,2904.98) 3(1475,1724.98)

## Via types
v1: diameter 18, hole 13, Top Layer to Bottom Layer, 253 vias
v2: diameter 39.37, hole 39.37, Top Layer to Bottom Layer, 2 vias

## Nets (pads, with @x,y where several pads share a name; then routed paths per layer and width w, separated by ;. In a path a pad name is that pad's centre, name@x,y a point inside that pad or via, vN(x,y) a via of type N, cw(c..) or ccw(c..) an arc to the next point about the centre after c; other vN are vias at no path point)
3.3V: C10.1 C12.2 C18.1 IC1.20 L3.1 LS1.1A OLED1.6 P3V.1 P3V.2 P3V.3 P3V.4 P14.1 P15.1 R14.2 R15.2 R22.2 SD*1.4 SPI1.5 VCC*2.2 VCC*2.4 | length 1199.5
  Top Layer w15: P3V.1@1040,1529.98 1040,1360 1145.02,1254.98 OLED1.6@1250,1254.98 ; v1(3310,362.23) 3310,390 3363.01,443.01 IC1.20@3415,443.01
  Top Layer w20: P15.1@2830,1964.98 P14.1@2830,2064.98
  Top Layer w30: VCC*2.2@186.97,1604.98 VCC*2.4@608.23,1604.98
  Bottom Layer w20: P15.1@2830,1964.98 P14.1@2830,2064.98
  other v1: 821.06,1561.99 570,1565 610,1565 650,1565 570,1605 610,1605 650,1605 570,1650 610,1650 650,1650 825,1682.74 755,2055 785,2054.98 815,2055 2832.24,2154.98 2850,2225 608.76,2241.11 3667.24,2294.98 3477.01,2449.98
5V: BT1.4 BT2.4 C1.2 C2.2 C5.1 C7.2 C8.2 IN1.1 P2.2 P3.2 P5.2 P5V.1 P5V.2 P5V.3 P5V.4 P9.1 P12.10 R1.2 R2.1 R7.1 R8.2 R27.2 R28.1 VCC*1.2 VCC*1.4 | length 3507.8
  Top Layer w30: VCC*1.2@186.97,1154.98 v1(608.23,1154.98)
  Bottom Layer w20: v1(964.84,2951) 964.84,2895.16 985,2875 1269.98,2875 P9.1@1335,2809.98 1335,2805 1285,2755 1285,1481.04 1035,1231.04 P5V.3@1035,1154.98
  Bottom Layer w30: v1(3610,637.74) v1(3690,637.74) 3772.76,637.74 P2.2@3775,639.98 3775,532.23 v1(3772.76,529.98) ; R7.1@3610,1152.74 R8.2@3690,1152.74 3772.76,1152.74 P3.2@3775,1154.98 3777.76,1152.23 v1(3777.76,1044.98) ; v1(3610,1667.74) R27.2@3690,1667.74 3772.76,1667.74 P5.2@3775,1669.98 3775,1547.74 v1(3777.76,1544.98)
  other v1: 825,1072.23 570,1120 605,1120 645,1120 570,1150 645,1150 570,1190 610,1190 645,1190 821.06,1202.97 2230,1620 2255,1620 2280,1620 2230,1640 2255,1640 2280,1640 2230,1660 2255,1660 2280,1660
"ADC0 SE16": U2.36
"ADC1 SE16": U2.35
"BT RXD": BT1.1 U2.66 | length 1150.7
  Top Layer w10: U2.66@2966.38,597.66 2966.38,483.6 3141,308.98 3621,308.98 BT1.1@3840,89.98
"BT TXD": BT1.2 U2.67 | length 1087.9
  Top Layer w10: U2.67@2986.06,597.66 2986.06,486.55 3147.63,324.98 3630,324.98 3765,189.98 BT1.2@3840,189.98
CE: SD*1.1 SPI1.2 U2.8 | length 2113.6
  Top Layer w8: SPI1.2@990,2154.98 1291.01,2154.98 2224.31,1221.67 U2.8@2322.68,1221.67
  Top Layer w10: SD*1.1@608.76,2111.19 941.2,2111.19 SPI1.2@985,2154.98
CLK: 1614LDC.1 P14.2 P15.2 R14.1 U2.115 | length 1383.1
  Top Layer w10: P14.2@2730,2064.98 P15.2@2730,1964.98 2775,1919.98 2787.76,1919.98 2789.29,1921.51 2916.31,1921.51 2966.38,1871.44 U2.115@2966.38,1432.3 ; v1(2740,2249.98) 2798.24,2249.98 1614LDC.1@2930.53,2382.27
  Bottom Layer w10: P15.2@2730,1964.98 P14.2@2730,2064.98 2690,2104.98 2690,2199.98 v1(2740,2249.98)
DAC0: U2.38
DAC1: U2.39
EGND: C3.2 P1.2 pad.1@160,169.98 R4.2 R5.2 R6.2 R9.2 R10.2 R11.2
  other v1: 827.99,69.98 827.99,179.98 645,660 677.59,660 710,660 495,787.99 585,787.99
EZP_CS: R26.2 U2.54 | length 94.2
  Top Layer w10: v1(2730,691.75) 2730.16,691.6 U2.54@2730.16,597.66
GND: 1614LDC.8 1614LDC.17 BT1.3 BT2.3 C1.1 C2.1 C4.2 C5.2 C6.1 C7.1 C8.1 C9.2 C10.2 C11.1 C12.1 C14.1 C15.1 C16.1 C17.1 C18.2 C19.1 C20.1 C21.1 C22.1 C23.2 C24.1 C25.1 C26.1 C27.1 C28.1 C29.1 C30.1 C31.1 C32.1 C33.1 C34.1 C35.1 C36.1 C37.1 C41.1 C42.1 C43.2 C44.1 C45.2 C46.1 C47.2 C48.1 C49.2 C50.1 C51.2 C52.2 C53.1 C54.1 C55.2 C56.2 C57.1 C58.1 C59.1 C60.1 D1.1 D2.2 D4.1 D5.1 D6.1 D7.1 IC1.1 IC1.10 IC1.19 JTAG1.3 JTAG1.5 JTAG1.7 JTAG1.9 OLED1.7 P2.1 P3.1 P5.1 P9.2 P12.1 P12.19 P14.4 P15.4 pad.0@3005,2414.98 PGD.1 PGD.2 PGD.3 PGD.4 Q1.2 R3.1 R4.1 R5.1 R6.1 R9.1 R10.1 R11.1 R13.2 R17.2 R18.2 R19.2 R20.1 R21.1 s2.1 S3.1 S4.1 S5.1 s6.1 SD*1.6 SD*1.9 SPI1.1 U1.1 U2.6 U2.17 U2.18 U2.33 U2.34 U2.44 U2.57 U2.71 U2.93 U2.107 U2.121 U2.134 VCC*1.1 VCC*2.1 Y1.2 Y3.2 | length 3698.9
  Top Layer w10: v1(2247.24,684.98) 2272.13,709.86 U2.34@2322.68,709.86 ; U2.33@2322.68,729.55 2359.55,729.55 2375,745 v1(2375,785) ; U2.18@2322.68,1024.82 2379.82,1024.82 2455,1100 2542.23,1100 v1(2577.24,1064.98) ; U2.17@2322.68,1044.51 2379.51,1044.51 2455,1120 2532.26,1120 v1(2577.24,1164.98) ; U2.6@2322.68,1261.04 2378.96,1261.04 2420,1220 2532.26,1220 v1(2577.24,1264.98) ; U2.44@2533.31,597.66 2533.31,628.05 2685,779.74 2685,881.02 2665,901.02 v1(2665,967.23) ; v1(2587.13,1494.43) 2592.36,1489.19 U2.134@2592.36,1432.3 ; v1(2760,967.23) 2789.21,938.01 U2.57@2789.21,597.66 ; U2.121@2848.27,1432.3 2848.27,1295.49 v1(2847.76,1294.98) 2887.74,1255 3030,1255 3114.78,1339.78 U2.107@3157.32,1339.78 ; v1(3027.24,1099.98) 3063.03,1064.19 U2.93@3157.32,1064.19 ; U2.71@3064.8,597.66 3064.8,540.2 v1(3065,540) ; 1614LDC.8@3079.47,2382.27 3086.74,2375 v1(3170,2375)
  Top Layer w30: P15.4@2530,1964.98 P14.4@2530,2064.98
  Bottom Layer w30: D6.1@1435,99.98 D5.1@1435,199.98 D4.1@1435,299.98 D7.1@1435,399.98 ; C17.1@2465,1532.74 2503.31,1494.43 v1(2587.13,1494.43) ; P15.4@2530,1964.98 P14.4@2530,2064.98 ; C15.1@2965,1642.23 C14.1@3060,1642.23 v1(3265,1642.23)
  other v1: 952.01,69.98 3202.99,89.98 3005,92.74 2047.2,144.98 1435,150 3415,170 952.01,179.98 2135,190 3645.32,194.98 1435,250 3310,267.74 3425,272.74 3520,272.74 2042.76,304.98 1435,350 3440,465 3867.24,529.98 3065,705 2580,785 2152.76,884.98 495,912.01 585,912.01 3427.99,939.98 2577.24,964.98 47.99,969.98 1802.76,974.98 825,977.74 3027.24,999.98 3872.24,1044.98 62.76,1054.98 2752.76,1064.98 2752.76,1164.98 2665,1252.74 2760,1252.74 155,1255 186.97,1254.98 220,1255 821.06,1326.99 47.99,1384.98 821.06,1437.97 62.76,1479.98 3872.24,1544.98 3160,1669.98 150,1705 185,1705 225,1705 825,1777.23 3275,1895 960,2055 985,2054.98 1010,2055 3667.24,2099.98 3187.01,2189.98 3667.24,2194.98 3280,2225 3280,2249.98 3280,2275 608.76,2327.72 3412.24,2349.98 3477.01,2349.98 3412.24,2449.98 608.76,2457.64 2580,2605 2710,2605 2970,2610 3095,2610 3225,2610 3355,2610 3485,2610 2840,2625 2580,2925 2710,2925 2840,2925 2965,2925 3095,2925 3225,2925 3355,2925 3485,2925 610.51,2951 1319.17,2951
IRQ: SD*1.8 SPI1.8 U2.1 | length 2184
  Top Layer w8: SD*1.8@608.76,2414.34 635.65,2414.34 695,2354.98 SPI1.8@785,2354.98 825,2394.98 1150,2394.98 2185.51,1359.47 U2.1@2322.68,1359.47
K3.3V: C14.2 C15.2 C16.2 C19.2 C20.2 C23.1 C29.2 C30.2 C31.2 C32.2 C33.2 C34.2 C35.2 C36.2 C37.2 D1.2 JTAG1.1 L1.1 L2.1 R24.2 R25.2 R26.1 R31.2 U1.2 U1.4 U2.5 U2.16 U2.21 U2.42 U2.43 U2.56 U2.70 U2.94 U2.108 U2.122 U2.135 | length 4036.2
  Top Layer w10: U2.21@2322.68,965.77 2383.54,965.77 v1(2482.76,1064.98) ; U2.16@2322.68,1064.19 2376.57,1064.19 2478.74,1166.37 v1@2481.37,1166.37 ; U2.5@2322.68,1280.73 2469.27,1280.73 v1(2485,1265) ; U2.42@2493.94,597.66 2493.94,633.94 2525,665 2525,810 2587.74,872.74 v1(2665,872.74) 2665,785 2513.62,633.62 U2.43@2513.62,597.66 ; U2.135@2572.68,1432.3 2572.68,1372.32 2600,1345 v1(2665,1345) ; v1(2760,872.74) 2769.53,863.21 U2.56@2769.53,597.66 ; v1(2760,1345) 2785,1345 2828.58,1388.58 U2.122@2828.58,1432.3 ; v1(2847.24,1064.98) 2847.24,672.76 2875,645 3035,645 3045.12,634.88 U2.70@3045.12,597.66 ; v1(2942.24,1294.98) 3006.73,1359.47 U2.108@3157.32,1359.47 ; v1(3027.24,1199.98) 3027.24,1142.76 3086.12,1083.88 U2.94@3157.32,1083.88
  Bottom Layer w30: U1.2@2587.13,1584.98 U1.4@2852.87,1584.98 ; R25.2@3067.76,1815 2975,1815 2860,1700 2860,1592.11 U1.4@2852.87,1584.98 ; v1(3265,1547.74) C14.2@3060,1547.74 C15.2@2965,1547.74 2962.26,1547.74 2925.02,1584.98 U1.4@2852.87,1584.98
  other v1: 3005,187.23 2230,192.23 2312.24,304.98 2152.76,684.98 2152.76,784.98 2730,786.24 2482.76,1164.98 2847.24,1164.98 3160,1514.98 2875,1570 2875,1595 2875,1620 2875,1645
MISO: SD*1.3 SPI1.4 U2.4 | length 2304.4
  Top Layer w8: SD*1.3@608.76,2197.8 609.5,2198.54 663.56,2198.54 675,2209.98 1275.6,2209.98 2185.17,1300.41 U2.4@2322.68,1300.41
  Bottom Layer w6: v1(885,2219.98) 885,2309.98 930,2354.98 v1(985,2354.98)
MOSI: SD*1.7 SPI1.7 U2.2 | length 2245.9
  Top Layer w8: SD*1.7@608.76,2371.03 653.95,2371.03 715,2309.98 1215.2,2309.98 2185.4,1339.78 U2.2@2322.68,1339.78
  Bottom Layer w8: v1(785,2254.98) 805,2254.98 v1(865,2314.98)
Net1614LDC_3: 1614LDC.3 R13.1 R16.1 | length 397
  Top Layer w10: 1614LDC.3@2958.37,2354.43 2915,2311.06 2915,2229.98 2955,2189.98 R13.1@3062.99,2189.98 R16.1@3062.99,2099.98
Net1614LDC_4: 1614LDC.4 1614LDC.6 R19.1 | length 727.5
  Top Layer w10: 1614LDC.4@2972.29,2340.51 2955,2323.22 2955,2289.98 2995,2249.98 3170,2249.98 3215,2294.98 ; 1614LDC.6@3051.63,2354.43 3073.58,2332.48 3197.5,2332.48 3215,2314.98 ; 3215,2294.98 3215,2314.98 ; 3215,2294.98 v1(3225,2304.98) 3215,2314.98
  Bottom Layer w10: v1(3225,2304.98) 3270,2349.98 R19.1@3352.99,2349.98
Net1614LDC_7: 1614LDC.7 C59.2 C60.2 R22.1 | length 359.8
  Top Layer w10: 1614LDC.7@3065.55,2368.35 3083.92,2349.98 C60.2@3317.76,2349.98 C59.2@3317.76,2449.98
  other v1: 3335,2449.98
Net1614LDC_9: 1614LDC.9 C57.2 R39.1 | length 558.3
  Top Layer w10: 1614LDC.9@3079.47,2447.69 3156.76,2524.98 3400,2524.98 3455,2579.98 R39.1@3455,2707.97
  other v1: 3455,2707.23
Net1614LDC_10: 1614LDC.10 C55.1 R38.1 | length 428
  Top Layer w10: 1614LDC.10@3065.55,2461.61 3148.92,2544.98 3275,2544.98 3325.71,2595.7 R38.1@3325.71,2707.97
  other v1: 3325,2707.23
Net1614LDC_11: 1614LDC.11 C53.2 R37.1 | length 292.4
  Top Layer w10: 1614LDC.11@3051.63,2475.53 3196.43,2620.33 R37.1@3196.43,2707.97
  other v1: 3195,2707.23
Net1614LDC_12: 1614LDC.12 C51.1 R36.1 | length 230.7
  Top Layer w10: 1614LDC.12@3037.71,2489.45 3067.14,2518.88 R36.1@3067.14,2707.97
  other v1: 3065,2707.23
Net1614LDC_13: 1614LDC.13 C50.2 R34.2 | length 232.8
  Top Layer w10: R34.2@2937.86,2707.97 2937.86,2523.88 1614LDC.13@2972.29,2489.45
  other v1: 2940,2707.23
Net1614LDC_14: 1614LDC.14 C49.1 R33.2 | length 294.5
  Top Layer w10: R33.2@2808.57,2707.97 2808.57,2625.33 1614LDC.14@2958.37,2475.53
  other v1: 2810,2707.23
Net1614LDC_15: 1614LDC.15 C48.2 R30.2 | length 367.2
  Top Layer w10: R30.2@2679.29,2707.97 2698.09,2707.97 1614LDC.15@2944.45,2461.61
  other v1: 2680,2707.23
Net1614LDC_16: 1614LDC.16 C47.1 R35.2 | length 496
  Top Layer w10: R35.2@2550,2707.97 2550,2694.98 2604.98,2640 2738.22,2640 1614LDC.16@2930.53,2447.69
  other v1: 2550,2707.23
NetC4_1: C4.1 C6.2 F1.2 VCC*1.3 | length 257.4
  Bottom Layer w30: v1(157.24,1054.98) 172.01,1040.22 C4.1@172.01,969.98 327.03,969.98 F1.2@335,962.01
  other v1: 145,1070 170,1070
NetC9_1: C9.1 C11.2 F2.2 VCC*2.3 | length 256.7
  Bottom Layer w30: C11.2@165,1490 172.01,1482.99 C9.1@172.01,1384.98 174.02,1386.99 F2.2@320,1386.99
  other v1: 157.24,1479.98 145,1500 165,1500
NetC13_1: C13.1 C44.2 P4.2 R30.1 | length 282.4
  Top Layer w10: P4.2@2650,3099.98 2647.24,3097.23 C13.1@2647.24,2989.98 2647.24,2982.74 2679.29,2950.7 R30.1@2679.29,2831.99
  other v1: 2680,2832.74
NetC13_2: C13.2 C43.1 P4.1 R35.1 | length 268
  Top Layer w10: R35.1@2550,2831.99 P4.1@2550,3099.98
  other v1: 2550,2832.74
NetC21_2: C21.2 L1.2 U2.31 U2.32 | length 233.5
  Top Layer w10: U2.32@2322.68,749.23 2275.75,749.23 v1(2260,764.98) 2263.94,768.92 U2.31@2322.68,768.92
  Bottom Layer w15: L1.2@2247.24,784.98 C21.2@2247.24,884.98
NetC22_2: C22.2 U2.37 | length 422.7
  Top Layer w10: U2.37@2395.51,597.66 2395.51,910.51 2449.98,964.98 v1(2482.76,964.98)
NetC25_2: C25.2 C26.2 L2.2 Y1.4 | length 312.4
  Bottom Layer w15: Y1.4@2915,894.98 2932.76,912.74 C25.2@2932.76,999.98 C26.2@2932.76,1099.98 L2.2@2932.76,1199.98
NetC27_2: C27.2 R32.1 U2.40 Y2.1 | length 238.6
  Top Layer w10: v1(2430,669.98) 2454.57,645.41 U2.40@2454.57,597.66
  Bottom Layer w10: C27.2@2350,692.74 2415,692.74 Y2.1@2415,779.98
  Bottom Layer w15: R32.1@2415,692.74 R32.1@2417.76,689.98
NetC28_2: C28.2 R32.2 U2.41 Y2.2 | length 239.1
  Top Layer w10: U2.41@2474.25,597.66 2474.25,644.23 v1(2500,669.98)
  Bottom Layer w10: Y2.2@2515,779.98 2515,692.74 C28.2@2580,692.74
  Bottom Layer w15: R32.2@2512.24,689.98 R32.2@2515,692.74
NetC38_1: C38.1 C46.2 P6.2 R34.1 | length 277
  Top Layer w10: P6.2@2918.33,3099.98 2917.24,3098.89 C38.1@2917.24,2989.98 2917.24,2977.74 2937.86,2957.12 R34.1@2937.86,2831.99
  other v1: 2935,2832.74
NetC38_2: C38.2 C45.1 P6.1 R33.1 | length 272
  Top Layer w10: R33.1@2808.57,2831.99 2818.33,2841.75 P6.1@2818.33,3099.98
  other v1: 2810,2832.74
NetC39_1: C39.1 C52.1 P7.1 R36.2 | length 281.1
  Top Layer w10: R36.2@3067.14,2831.99 3067.14,2952.12 3092.76,2977.74 C39.1@3092.76,2989.98 3092.76,3093.89 P7.1@3086.67,3099.98
  other v1: 3065,2832.74
NetC39_2: C39.2 C54.2 P7.2 R37.2 | length 272
  Top Layer w10: P7.2@3186.67,3099.98 3196.43,3090.22 R37.2@3196.43,2831.99
  other v1: 3195,2832.74
NetC40_1: C40.1 C58.2 P8.2 R39.2 | length 268
  Top Layer w10: R39.2@3455,2831.99 P8.2@3455,3099.98
  other v1: 3455,2832.74
NetC40_2: C40.2 C56.1 P8.1 R38.2 | length 280.1
  Top Layer w10: R38.2@3325.71,2831.99 3325.71,2960.7 3355,2989.98 P8.1@3355,3099.98
  other v1: 3325,2832.74
NetC41_2: C41.2 C42.2 L3.2 Y3.4 | length 287.8
  Top Layer w15: Y3.4@3480,2099.98 v1(3572.76,2099.98)
  Bottom Layer w15: v1(3572.76,2099.98) C41.2@3572.76,2194.98 L3.2@3572.76,2294.98
NetD2_1: D2.1 R24.1 | length 80.5
  Top Layer w10: D2.1@2137.24,304.98 R24.1@2217.76,304.98
NetD3_1: D3.1 R25.1
  other v1: 3162.24,1815
NetF3_2: F3.2 IN1.2 | length 110
  Bottom Layer w30: IN1.2@2255,1517.97 F3.2@2365,1517.97
NetIC1_2: IC1.2 P10.2 | length 150.5
  Top Layer w10: IC1.2@3440.59,194.98 3440.59,144.39 3490,94.98 P10.2@3520,94.98
NetIC1_3: IC1.3 P10.1 | length 222.3
  Top Layer w10: IC1.3@3466.18,194.98 3466.18,148.8 3475,139.98 3575,139.98 P10.1@3620,94.98
NetIC1_4: IC1.4 IC1.5 IC1.6 IC1.7 IC1.8 IC1.9 IC1.11 IC1.12 IC1.13 IC1.14 IC1.15 IC1.16 P10.3 R21.2 | length 760.5
  Top Layer w10: IC1.4@3491.77,194.98 IC1.5@3517.36,194.98 IC1.6@3542.95,194.98 IC1.7@3568.54,194.98 IC1.8@3594.13,194.98 IC1.9@3619.72,194.98 ; IC1.16@3517.36,443.01 IC1.15@3542.95,443.01 IC1.14@3568.54,443.01 IC1.13@3594.13,443.01 IC1.12@3619.72,443.01 IC1.11@3645.32,443.01
  Bottom Layer w10: P10.3@3420,94.98 3429.98,94.98 3505,170 3610,275 v1(3610,420)
  Bottom Layer w20: R21.2@3327.01,89.98 3332.01,94.98 P10.3@3420,94.98
  other v1: 3530,195
NetLS1_2: LS1.2A Q1.3 | length 327.6
  Top Layer w10: Q1.3@3359.29,1930 3420,1930 3485,1865 LS1.2A@3485,1690
NetQ1_2: Q1.1 R12.1 | length 116.2
  Top Layer w10: R12.1@3177.24,1910 3182.26,1910 3237.26,1965 Q1.1@3270.71,1965
NetR3_2: R3.2 sw1.4 | length 138.1
  Bottom Layer w20: R3.2@1897.24,974.98 2000,974.98 v1(2025,999.98)
NetR16_2: R16.2 Y3.3 | length 93
  Top Layer w10: R16.2@3187.01,2099.98 Y3.3@3280,2099.98